# Altium PCB PCB-UVA-3.0.PcbDoc
Units mm, origin at the board's own origin, x right, y up, seen from the top; angles counter-clockwise.
Board outline 35.79 x 61.35 mm, 2 copper layers (Top Layer, Bottom Layer); 73 components, 53 nets, 232 pads, 72 vias.
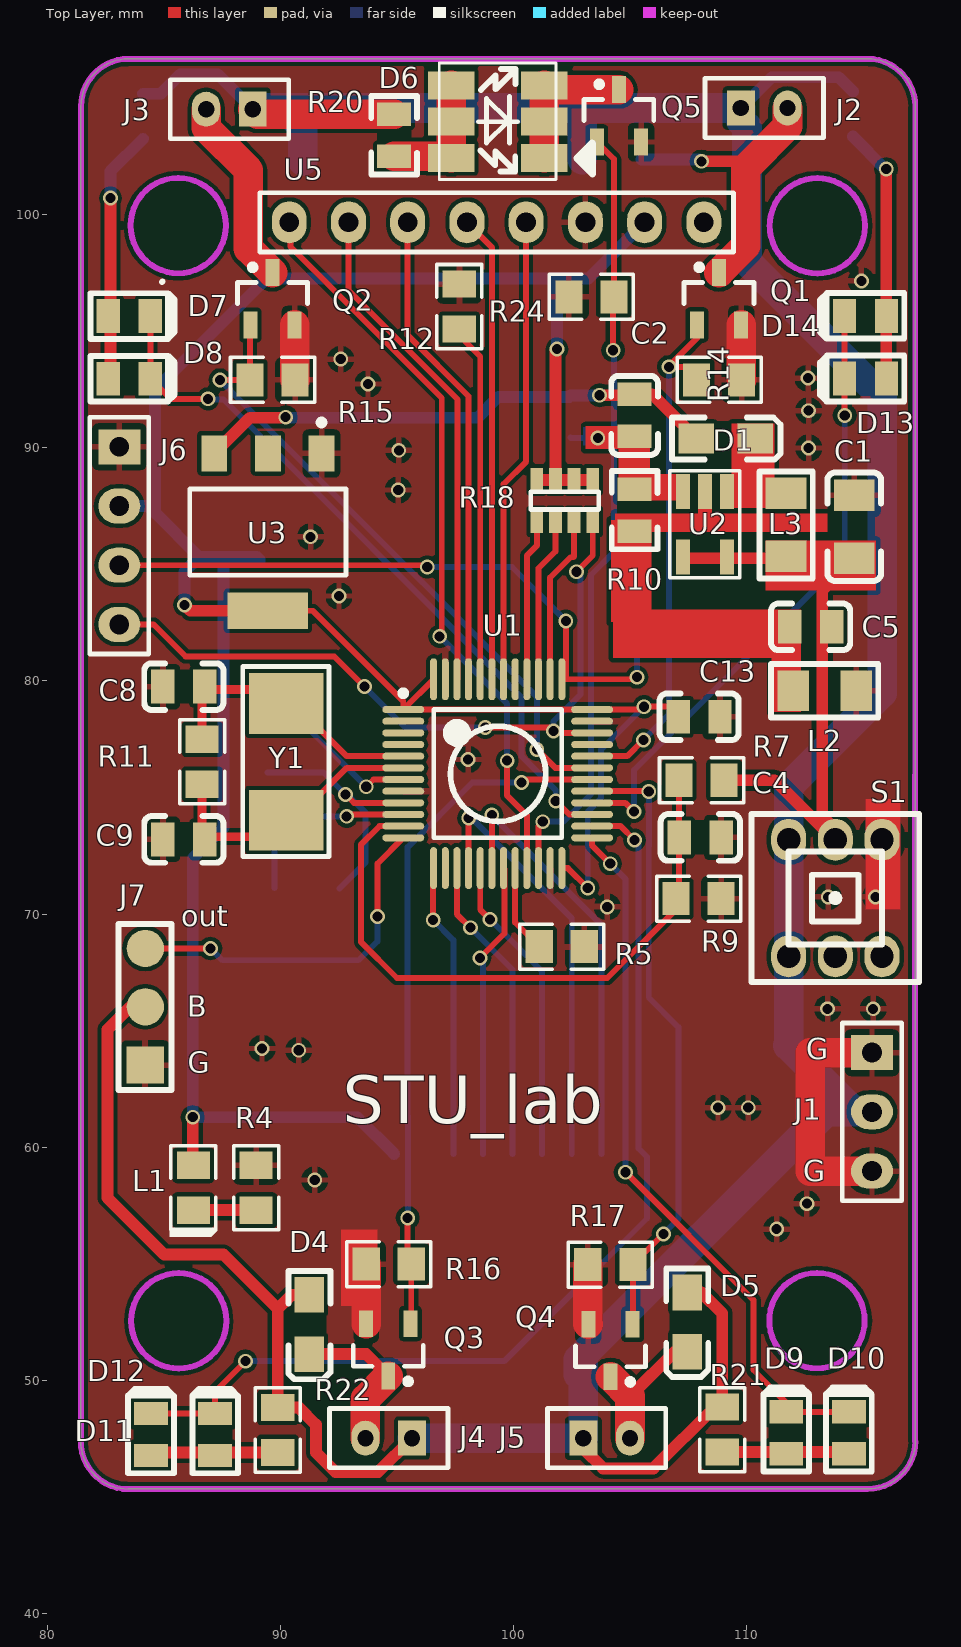
[diagram p0: Top Layer view]
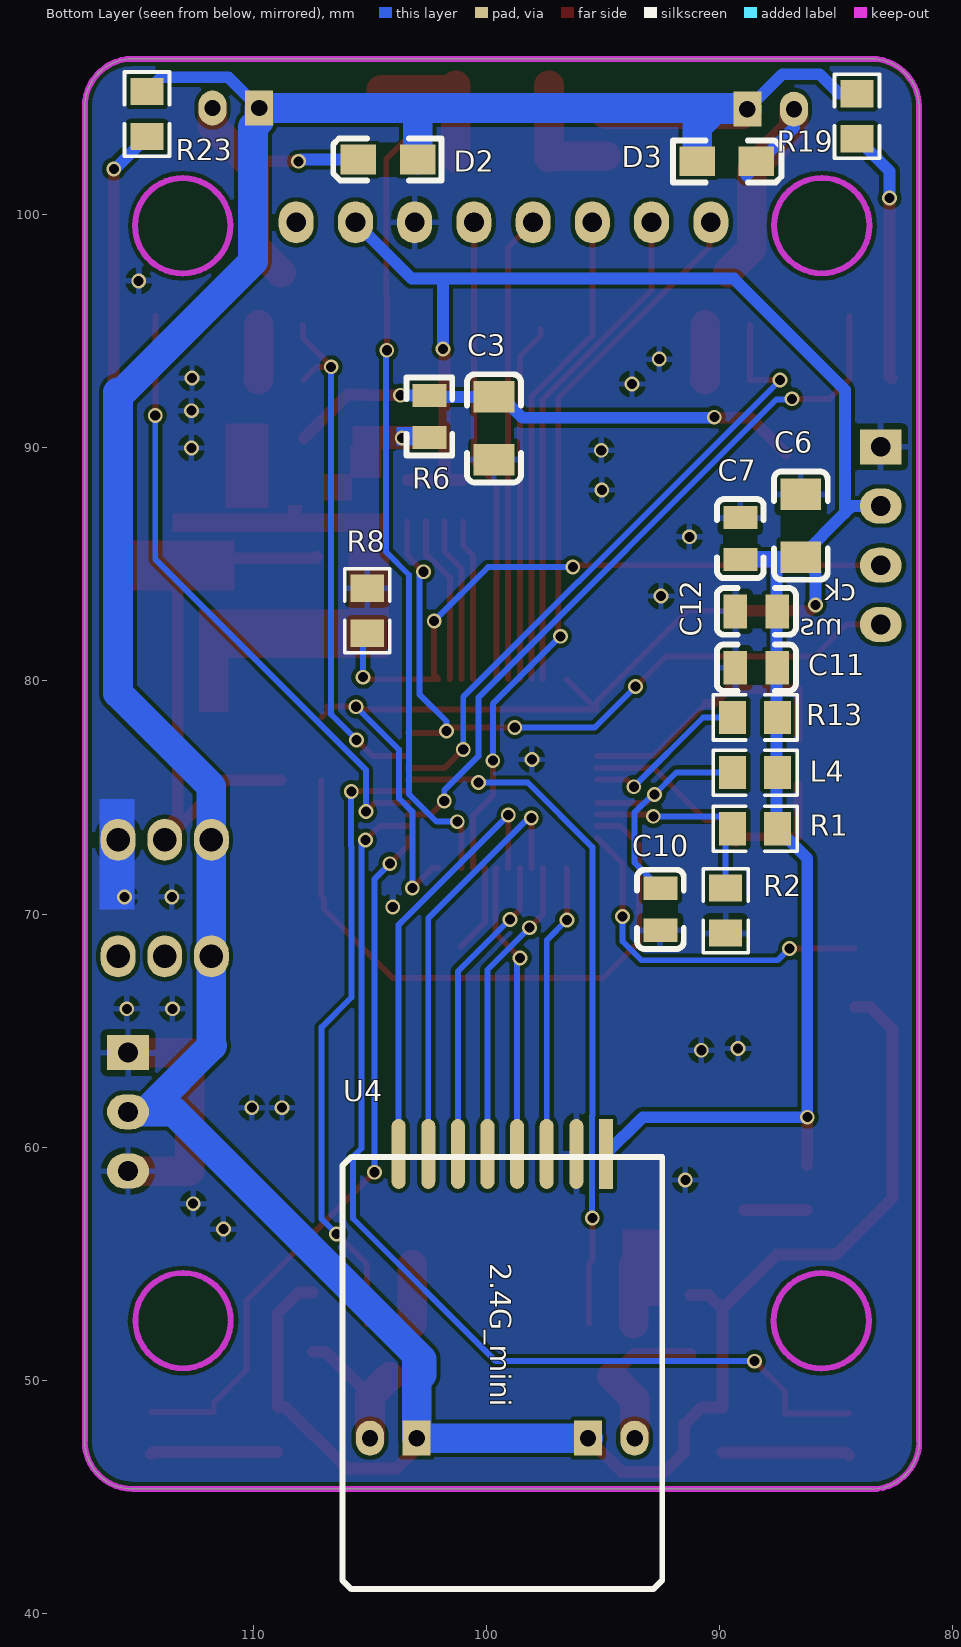
[diagram p1: Bottom Layer view, seen from below]
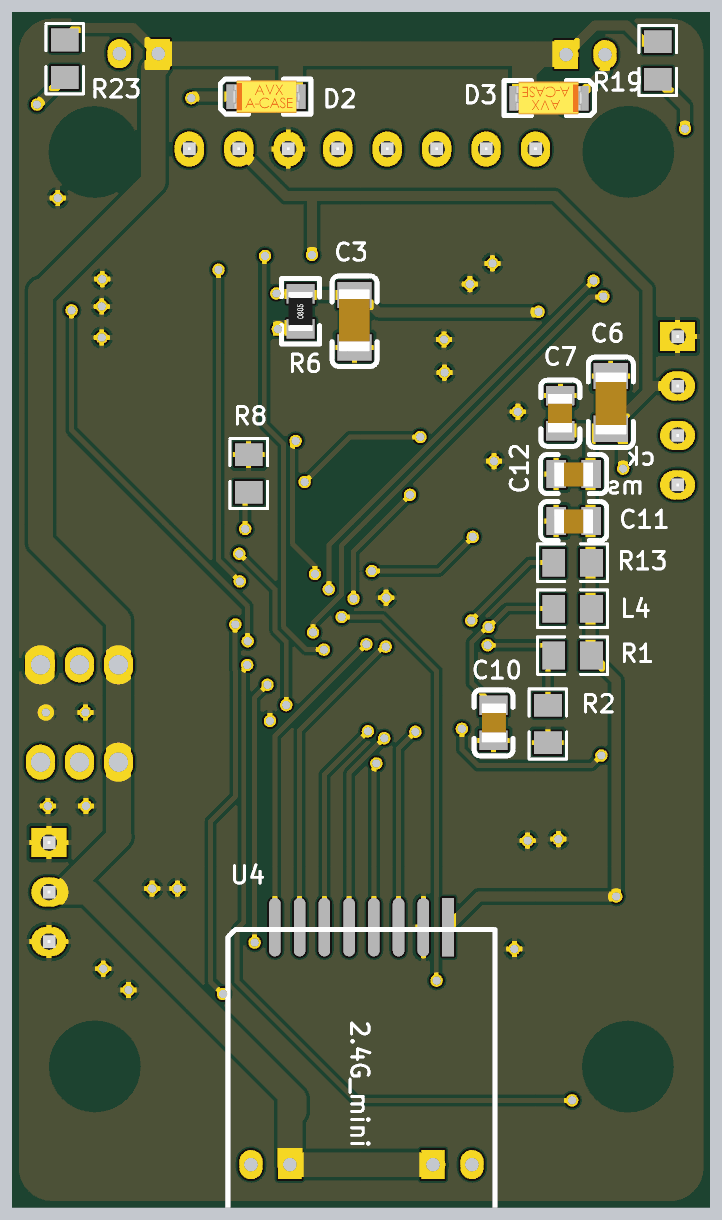
[diagram p2: 3D render of the assembled board from below, using the file's embedded part models]

## Layer stack, top to bottom
Top Solder: solder mask 0.0102, Solder Resist, Dk 3.5
Top Layer: signal copper 0.0356
Dielectric 1: dielectric 0.32, FR-4, Dk 4.8
Bottom Layer: signal copper 0.0356
Bottom Solder: solder mask 0.0102, Solder Resist, Dk 3.5

## Board outline
81.433,47.381 ccw(c83.478,47.381) 83.478,45.336 83.478,45.345 115.179,45.345 ccw(c115.179,47.389) 117.224,47.389 117.214,47.389 117.22,104.638 ccw(c115.176,104.638) 115.176,106.683 83.484,106.683 ccw(c83.484,104.638) 81.44,104.638

## Design rules (kind name [scope] priority, off if disabled: settings)
Clearance [All] p1: gap=0.178 ignorepadtopadclearanceinfootprint=FALSE
PlaneConnect [All] p1: planeconnectstyle=Relief reliefexpansion=0.508 reliefentries=4 reliefconductorwidth=0.381 reliefairgap=0.254
PolygonConnect [All] p1: connectstyle=Relief reliefconductorwidth=0.254 reliefentries=4 polygonreliefangle="90 Angle" airgapwidth=0.254
RoutingVias [All] p1: holewidth=0.432 width=0.635 viastyle="Through Hole" minholewidth=0.432 minwidth=0.635 maxholewidth=0.711 maxwidth=1.27
SolderMaskExpansion [All] p1: expansion=0.102
Width [All] p1: maxlimit=1.27 minlimit=0.254 preferedwidth=0.254
29 further rules are at their usual default settings.

## Components (designator, comment, footprint, x,y, rotation, side; value= is the part's Value field where it differs from the comment)
C1 "10UF" 1206C 114.605,86.614 r270 top
C2 "3.3pF" 0805C 105.181,91.389 r270 top
C3 "4.7UF" 1206C 99.67,90.83 r270 bottom
C4 "100NF" 0805C 108.002,73.288 r0 top
C5 "4.7UF" 0805C 112.734,82.321 r180 top
C6 "10UF" 1206C 86.512,86.665 r90 bottom
C7 "0.1UF" 0805C 89.103,86.106 r90 bottom
C8 "20PF" 0805C 85.852,79.756 r0 top
C9 "20PF" 0805C 85.852,73.203 r0 top
C10 "100NF" 0805C 92.532,70.206 r270 bottom
C11 "100NF" 0805C 88.417,80.569 r0 bottom
C12 "100NF" 0805C 88.417,82.982 r0 bottom
C13 "100NF" 0805C 107.95,78.461 r0 top
D1 "DIODE-S" C_SMA_3216 109.093,90.399 r180 top
D2 "DIODE-S" C_SMA_3216 104.216,102.362 r180 bottom
D3 "DIODE-S" C_SMA_3216 89.687,102.286 r0 bottom
D4 "DIODE-S" C_SMA_3216 91.237,52.4 r90 top
D5 "DIODE-S" C_SMA_3216 107.442,52.502 r90 top
D6 "LED" LED5050_RGB 99.314,103.988 r0 top
D7 "LED" 0805D 83.515,95.649 r0 top
D8 "LED" 0805D 83.515,92.964 r0 top
D9 "LED" 0805D 111.691,47.752 r90 top
D10 "LED" 0805D 114.376,47.752 r90 top
D11 "LED" 0805D 87.193,47.683 r90 top
D12 "LED" 0805D 84.444,47.683 r90 top
D13 "LED" 0805D 115.087,92.971 r180 top
D14 "LED" 0805D 115.087,95.656 r180 top
J1 "Li Battery - 3.7V" P3_2.54-1 115.367,61.519 r270 top
J2 "M1" P2_2.0-1 110.744,104.572 r180 top
J3 "M1" P2_2.0-1 87.808,104.521 r0 top
J4 "M1" P2_2.0-1 94.64,47.523 r0 top
J5 "M1" P2_2.0-1 103.988,47.523 r180 top
J6 "ST_LINK" P4_2.54-1 83.083,86.233 r270 top
J7 "SIP3" PC_3 84.201,63.525 r90 top
L1 "白" D0805 86.26,59.207 r270 top
L2 "10UH" 1206 113.335,79.578 r180 top
L3 "10UH" 1206 111.684,86.69 r270 top
L4 "INDUCTOR" R0805 88.467,76.073 r0 bottom
Q1 "SI2302" SI2302 108.788,96.393 r90 top
Q2 "SI2302" SI2302 89.637,96.393 r90 top
Q3 "SI2302" SI2302 94.635,51.306 r270 top
Q4 "SI2302" SI2302 104.165,51.283 r270 top
Q5 "SI2302" SI2302 104.496,104.242 r90 top
R1 "RES" R0805 88.477,73.66 r180 bottom
R2 "RES" R0805 89.738,70.146 r90 bottom
R4 "Res1" R0805 88.953,58.262 r90 top value=1k
R5 "RES" R0805 102.057,68.605 r0 top
R6 "620K" 0805R 102.438,91.338 r90 bottom
R7 "RES" R0805 108.062,75.743 r180 top
R8 "RES" R0805 105.102,83.007 r90 bottom
R9 "RES" R0805 107.925,70.663 r0 top
R10 "200K" 0805R 105.181,87.325 r90 top
R11 "RES" R0805 86.637,76.53 r90 top
R12 "RES" R0805 97.663,96.063 r270 top
R13 "RES" R0805 88.467,78.435 r0 bottom
R14 "RES" R0805 108.814,92.913 r180 top
R15 "RES" R0805 89.662,92.913 r180 top
R16 "RES" R0805 94.635,54.989 r0 top
R17 "RES" R0805 104.14,54.966 r0 top
R18 "10k" 8P4R_0603 102.21,87.732 r270 top
R19 "RES" R0805 84.099,104.216 r90 bottom
R20 "100R" 0805R 94.869,103.403 r270 top
R21 "RES" R0805 108.941,47.897 r270 top
R22 "RES" R0805 89.876,47.879 r270 top
R23 "RES" R0805 114.554,104.318 r270 bottom
R24 "RES" R0805 103.327,96.469 r0 top
S1 "SW-DPDT" KEY_KFT7.0 113.792,70.688 r270 top
U1 "STM32F103C8T6" LQFP48_N 99.314,76.022 r0 top
U2 "TPS6140" SOT-23-5 109.15,88.125 r270 top
U3 "AMS1117" ZZ311 89.459,86.385 r180 top
U4 "2.4G" 2.4G_mini 94.869,59.715 r0 bottom
U5 "GY_86" P8_2.54-1 99.263,99.67 r180 top
Y1 "CRYSTAL1" Y2 90.246,76.53 r90 top

## Footprints (in the part's own frame and the unit in brackets; to place one, negate y for a bottom-side part, rotate by r counter-clockwise, add the part's x,y. Pads: shape width x height; smd on the part's side, far side on the other; paste and mask are expansions set on the pad)
2.4G_mini [mm]
  rect 0.6x3 smd: 1(0,0)
  oval 0.6x3 smd: 2(1.27,0) 3(2.54,0) 4(3.81,0) 5(5.08,0) 6(6.35,0) 7(7.62,0) 8(8.89,0)
  silkscreen extent -2.41,0.13 11.3,18.67
8P4R_0603 [mil]
  rect 40x21.65 smd: 1(-35,46.5) 2(35,46.5) 3(-35,15) 4(35,15) 5(-35,-16.5) 6(35,-16.5) 7(-35,-47.99) 8(35,-47.99)
  silkscreen extent -15,-59 15,56
0805C [mm]
  rect 1x1.45 smd: 1(-0.9,0) 2(0.9,0)
  Top Layer pour cut-out: -0.432,0.749 -0.432,-0.737 0.406,-0.737 0.406,0.749
  silkscreen extent -1.7,-1 1.7,1, body extent -1,-0.61 1,0.64, height 1
0805D [mm]
  rect 1x1.45 smd: 1(-0.9,0) 2(0.9,0)
  Top Layer pour cut-out: -0.432,0.749 -0.432,-0.737 0.406,-0.737 0.406,0.749
  silkscreen extent -1.66,-0.98 1.94,0.98, body extent -1.16,-0.68 1.14,0.67, height 0.76
0805R [mm]
  rect 1x1.45 smd: 1(-0.9,0) 2(0.9,0)
  Top Layer pour cut-out: -0.432,0.749 -0.432,-0.737 0.406,-0.737 0.406,0.749
  silkscreen extent -1.68,-0.98 1.68,0.98, body extent -1,-0.62 1,0.63, height 0.5
1206 [mm]
  rect 1.35x1.75 smd: 1(-1.35,0) 2(1.35,0)
  Top Layer pour cut-out: -0.686,0.864 0.673,0.864 0.673,-0.876 -0.686,-0.876
  silkscreen extent -2.3,-1.14 2.3,1.14, body extent -1.61,-0.81 1.59,0.79, height 1.5
1206C [mm]
  rect 1.35x1.75 smd: 1(-1.35,0) 2(1.35,0)
  Top Layer pour cut-out: -0.686,0.876 0.673,0.876 0.673,-0.864 -0.686,-0.864
  silkscreen extent -2.32,-1.16 2.32,1.16, body extent -1.65,-0.81 1.55,0.79, height 1
C_SMA_3216 [mil] "英制1206/公制3216"
  rect 60x50 smd: 1(-50,0) 2(50,0)
  Top Layer pour cut-out: -19.69,29.53 19.69,29.53 19.69,-29.53 -19.69,-29.53
  silkscreen extent -93,-35 91,35, body extent -66,-33 68,33, height 67
D0805 [mil]
  rect 46x56 smd: 1(-1,0) 2(75,0)
  silkscreen extent -34,-40 120,40
KEY_KFT7.0 [mm] "7X7mm"
  oval 1.8x1.5 hole 1: 1(-2.5,2) 2(-2.5,0) 3(-2.5,-2) 4(2.5,-2) 5(2.5,0) 6(2.5,2)
  silkscreen extent -3.6,-3.6 3.6,3.6
LED5050_RGB [mm]
  rect 2x1.2 smd paste-0.05 mask+0.05: 1(-2,1.55) 2(-2,0) 3(-2,-1.55) 4(2,-1.55) 5(2,0) 6(2,1.55)
  silkscreen extent -2.51,-2.49 4.06,2.51, body extent -2.68,-2.5 2.62,2.5, height 1.6
LQFP48_N [mm]
  oval 1.8x0.3 smd: 1(-4.05,2.75) 2(-4.05,2.25) 3(-4.05,1.75) 4(-4.05,1.25) 5(-4.05,0.75) 6(-4.05,0.25) 7(-4.05,-0.25) 8(-4.05,-0.75) 9(-4.05,-1.25) 10(-4.05,-1.75) 11(-4.05,-2.25) 12(-4.05,-2.75) 25(4.05,-2.75) 26(4.05,-2.25) 27(4.05,-1.75) 28(4.05,-1.25) 29(4.05,-0.75) 30(4.05,-0.25) 31(4.05,0.25) 32(4.05,0.75) 33(4.05,1.25) 34(4.05,1.75) 35(4.05,2.25) 36(4.05,2.75)
  oval 0.3x1.8 smd: 13(-2.75,-4.05) 14(-2.25,-4.05) 15(-1.75,-4.05) 16(-1.25,-4.05) 17(-0.75,-4.05) 18(-0.25,-4.05) 19(0.25,-4.05) 20(0.75,-4.05) 21(1.25,-4.05) 22(1.75,-4.05) 23(2.25,-4.05) 24(2.75,-4.05) 37(2.75,4.05) 38(2.25,4.05) 39(1.75,4.05) 40(1.25,4.05) 41(0.75,4.05) 42(0.25,4.05) 43(-0.25,4.05) 44(-0.75,4.05) 45(-1.25,4.05) 46(-1.75,4.05) 47(-2.25,4.05) 48(-2.75,4.05)
  silkscreen extent -4.17,-2.75 2.75,3.57
P2_2.0-1 [mm]
  rect 1.2x1.5 hole 0.7: 1(1,0)
  oval 1.2x1.5 hole 0.7: 2(-1,0)
  silkscreen extent -2.54,-1.27 2.54,1.27
P3_2.54-1 [mm]
  rect 1.5x1.8 hole 0.85: 1(-2.54,0)
  oval 1.5x1.8 hole 0.85: 2(0,0) 3(2.54,0)
  silkscreen extent -3.81,-1.27 3.81,1.27, body extent -3.81,-1.47 3.81,1.45, height 8.56
P4_2.54-1 [mm]
  rect 1.5x1.8 hole 0.85: 1(-3.81,0)
  oval 1.5x1.8 hole 0.85: 2(-1.27,0) 3(1.27,0) 4(3.81,0)
  silkscreen extent -5.08,-1.27 5.08,1.27, body extent -5.08,-1.47 5.08,1.45, height 8.56
P8_2.54-1 [mm]
  oval 1.5x1.8 hole 0.85: 1(-8.89,0) 2(-6.35,0) 3(-3.81,0) 4(-1.27,0) 5(1.27,0) 6(3.81,0) 7(6.35,0) 8(8.89,0)
  silkscreen extent -10.16,-1.27 10.16,1.27, body extent -10.16,-1.47 10.16,1.45, height 8.56
PC_3 [mm]
  rect 1.6x1.6 smd: 1(0,0)
  round 1.6 smd: 2(2.5,0) 3(5,0)
  silkscreen extent -1.07,-1.12 6.05,1.14
R0805 [mil]
  rect 46x56 smd: 1(-37.79,0.07) 2(38.21,0.07)
  silkscreen extent -71,-38 71,38
SI2302 [mm]
  rect 1.15x0.6 smd: 1(-1.128,0.934) 2(-1.128,-0.966) 3(1.122,-0.016)
  silkscreen extent -0.2,-1.52 1.47,1.48, body extent -0.7,-1.52 0.7,1.48, height 1.1
SOT-23-5 [mm]
  rect 1.5x0.6 smd: 1(0,0) 2(0,-0.95) 3(0,-1.9) 4(2.8,-1.9) 5(2.8,0)
  silkscreen extent -0.9,-2.45 3.7,0.55
Y2 [mm]
  rect 2.6x3.2 smd: 1(-2.5,0) 2(2.5,0)
  silkscreen extent -4.06,-1.83 4.09,1.87
ZZ311 [mm]
  rect 1.1x1.55 smd: 1(-2.3,-3.375) 2(0,-3.375) 3(2.3,-3.375)
  rect 3.45x1.55 smd: 4(0,3.375)
  silkscreen extent -3.35,-4.82 3.35,1.85

## Part data
C1 C2 C3 C4 C5 C6 C7 C8 C9 C10 C11 C12 C13: library part CAP, "Capacitor/小容量电容"
D1 D2 D3 D4 D5: "SCHOTTKEY"
D6: library part LED_5050RGB
J1: library part SIP3
J2 J3 J4 J5: library part SIP2
J6: library part SIP4
L1: library part LED
L2 L3: library part L
R1 R2 R5 R7 R8 R9 R11 R12 R13 R14 R15 R16 R17 R19 R21 R22 R23 R24: "Semiconductor Resistor"
  R1 R2 R5 R8 R12 R13 R14 R15 R16 R17 R24: Val=10k
  R7 R9: Val=100k
  R11: Val=1M
  R19 R21 R22 R23: Val=2K
R4: "Resistor", LatestRevisionDate=17-Jul-2002, LatestRevisionNote="Re-released for DXP Platform.", Published=8-Jun-2000, Publisher="Altium Limited"
R6 R10 R20: library part Res
R18: library part 8P4R_0603, "8P4R_0603"
S1: "Double-Pole, Double-Throw Switch", LatestRevisionDate=17-Jul-2002, LatestRevisionNote="Re-released for DXP Platform.", PackageDescription="Switch; 6 Leads", PackageReference=DPDT-6, Published=24-Mar-1999, Publisher="Altium Limited"
U1: "STM32 ARM-based 32-bit MCU with 64 Kbytes Flash, 48-pin LQFP, Industrial Temperature"
U3: "Header, 2-Pin"
U4: library part 2.4G_mini
L4: Val=10uH
Y1: Val=8MHz

## Via types
v1: diameter 0.635, hole 0.432, Top Layer to Bottom Layer, 72 vias

## Nets (pads, with @x,y where several pads share a name; then routed paths per layer and width w, separated by ;. In a path a pad name is that pad's centre, name@x,y a point inside that pad or via, vN(x,y) a via of type N, cw(c..) or ccw(c..) an arc to the next point about the centre after c; other vN are vias at no path point)
2.4_CE: U1.13 U4.3 | length 12.6
  Top Layer w0.254: v1(96.545,69.748) 96.545,71.954 U1.13
  Bottom Layer w0.254: v1(96.545,69.748) 97.409,68.885 U4.3
2.4_CSN: U1.19 U4.4 | length 12.8
  Top Layer w0.254: v1(98.552,68.123) 99.606,69.177 99.606,71.93 U1.19
  Bottom Layer w0.254: v1(98.552,68.123) 98.679,67.996 U4.4
2.4_IRQ: U1.18 U4.8 | length 18.7
  Top Layer w0.254: v1(99.06,74.244) 99.06,71.976 U1.18
  Bottom Layer w0.254: v1(99.06,74.244) 103.759,69.545 U4.8
2.4_MISO: U1.16 U4.7 | length 18.5
  Top Layer w0.254: U1.16 98.064,74.112 v1(98.069,74.117)
  Bottom Layer w0.254: v1(98.069,74.117) 98.196,74.117 102.489,69.825 U4.7
2.4_MOSI: U1.17 U4.6 | length 13.4
  Top Layer w0.254: U1.17 98.564,70.194 v1(98.984,69.774)
  Bottom Layer w0.254: v1(98.984,69.774) 101.219,67.539 U4.6
2.4_SCK: U1.15 U4.5 | length 13.2
  Top Layer w0.254: U1.15 97.564,70 v1(98.146,69.418)
  Bottom Layer w0.254: v1(98.146,69.418) 99.949,67.615 U4.5
505LED: Q5.1 R24.2 U1.22 | length 33.3
  Top Layer w0.254: U1.22 101.064,73.784 v1(101.244,73.965) ; Q5.1 104.292,102.383 104.292,96.466 104.267,96.44 v1(104.267,94.183)
  Bottom Layer w0.254: v1(101.244,73.965) 102.133,73.965 103.314,75.146 103.314,84.544 104.305,85.534 104.305,94.145 v1(104.267,94.183)
+3.3V: C6.1 C7.1 C11.1 C12.1 C13.1 J6.2 L1.1 L4.1 R1.2 R13.1 R18.1 R18.3 R18.5 R18.7 U1.1 U1.24 U1.36 U1.48 U3.4 U4.1 U5.2 | length 123.6
  Top Layer w0.254: U3.4 91.386,83.01 95.264,79.132 U1.1 ; U1.48 U1.1 ; U1.24 102.323,71.972 v1(103.175,71.12) ; v1(105.588,78.892) 105.588,78.772 U1.36 U1.1 ; v1@105.588,78.905 C13.1@106.832,78.905 ; C13.1@106.738,78.772 C13.1
  Top Layer w0.508: v1(85.877,83.261) 86.128,83.01 U3.4 ; v1(86.233,61.29) 86.233,59.26 L1.1 ; R18.7 R18.5 ; v1(101.854,94.234) 101.791,94.171 R18.5 ; R18.1 R18.3 R18.5
  Bottom Layer w0.254: v1(103.175,71.12) 103.175,74.396 103.746,74.967 103.746,77.051 v1(105.588,78.892)
  Bottom Layer w0.508: J6.2 84.324,87.503 84.618,87.209 ; v1(85.877,83.261) 85.877,84.68 C6.1 ; C6.1@86.712,85.115 87.554,85.115 ; C7.1@89.103,85.115 87.554,85.115 ; C7.1 88.994,85.315 87.554,85.315 ; U4.1 93.294,61.29 v1(86.233,61.29) 86.233,72.388 R1.2 87.554,73.709 87.554,85.115 ; v1(101.854,94.234) 101.854,97.231 101.829,97.257 ; U5.2 103.2,97.257 101.829,97.257 ; 84.618,87.209 C6.1 ; 84.618,87.209 84.618,92.492 89.383,97.257 101.829,97.257 ; C6.1 87.554,85.315 ; 87.554,85.115 87.554,85.315
+5.0V: C2.1 C3.1 D1.2 R6.2 U3.3 | length 22.5
  Top Layer w0.508: U3.3 88.686,91.288 90.195,91.288 v1(90.221,91.313) ; v1(103.683,92.253) 105.145,92.253 C2.1 105.932,92.289 D1.2
  Bottom Layer w0.508: v1(90.221,91.313) 90.246,91.288 98.45,91.288 99.343,92.18 C3.1 102.38,92.18 R6.2 103.668,92.238 v1(103.683,92.253)
ADC: C4.1 R7.2 R9.1 U1.11 | length 27.3
  Top Layer w0.254: U1.11 94.245,73.772 93.447,72.974 93.447,68.809 94.996,67.259 104.013,67.259 106.965,70.211 R9.1 107.092,70.792 R7.2
BAT: D2.2 D3.2 D4.2 D5.2 J1.2 J2.1 J3.1 J4.1 J5.1 J7.2 R19.2 R20.1 R21.1 R22.1 R23.1 S1.3 S1.4 | length 167.8
  Top Layer w0.508: J7.2 83.551,66.025 82.575,65.049 82.575,57.836 85.014,55.397 87.554,55.397 89.878,53.073 ; D4.2 90.475,53.67 89.878,53.073 ; J4.1 94.193,46.076 92.354,46.076 91.516,46.914 91.516,48.108 90.785,48.839 R22.1 89.878,53.073 ; J5.1 102.988,47.076 103.835,46.228 105.994,46.228 108.623,48.857 R21.1 108.942,52.881 108.052,53.772 D5.2
  Top Layer w1.27: J3.1 89.025,104.303 R20.1
  Bottom Layer w0.508: R19.2 84.867,105.187 85.7,106.02 87.309,106.02 J3.1 ; J2.1 111.065,105.893 113.937,105.893 R23.1
  Bottom Layer w1.27: J3.1 90.195,104.521 90.957,103.759 D3.2 ; J3.1@88.859,104.572 102.972,104.572 ; J4.1 102.962,47.523 102.988,47.498 102.988,51.019 ; 102.768,50.241 102.768,50.902 113.386,61.519 J1.2@114.605,61.519 ; D2.2 102.946,104.546 102.972,104.572 ; J1.2 J1.2@114.605,61.519 ; 102.972,104.572 J2.1 109.744,104.022 110.007,103.759 110.007,97.993 115.621,92.38 115.799,92.38 115.799,79.477 111.792,75.47 S1.3 S1.4 111.792,64.396 111.76,64.364 J1.2@114.605,61.519
GND: C1.1 C3.2 C4.2 C6.2 C7.2 C8.1 C9.1 C10.2 C11.2 C12.2 C13.2 J1.1 J1.3 J6.1 J7.1 L2.1 Q1.2 Q2.2 Q3.2 Q4.2 Q5.2 R2.1 R4.2 R5.2 R8.2 R9.2 R12.1 R14.1 R15.1 R16.1 R17.1 R24.1 S1.1 U1.8 U1.23 U1.35 U1.47 U3.1 U4.2 U5.3 | length 20
  Top Layer w1.27: Q2.2 90.603,92.931 R15.1 ; Q3.2 93.669,54.985 R16.1 ; R17.1 103.18,52.43 Q4.2 ; Q1.2 109.754,92.931 R14.1 ; 112.725,58.979 J1.3 ; 112.725,59.182 112.725,64.059 J1.1
  other v1: 111.277,56.49 112.573,57.582 91.465,58.598 108.763,61.697 110.058,61.697 90.78,64.16 89.205,64.237 113.462,65.938 115.418,65.938 104.013,70.307 113.487,70.739 115.519,70.739 98.044,76.632 92.507,83.642 91.288,86.182 95.047,88.189 95.072,89.891 112.649,89.992 112.649,91.592 93.751,92.735 112.624,92.989 92.583,93.802 114.91,97.155
GY_DRDY: U1.21 U5.8 | length 32.3
  Top Layer w0.254: U5.8 90.627,99.67 90.424,99.466 90.424,98.628 96.914,92.138 96.914,82.004 v1(96.825,81.915) ; v1(99.72,76.581) 99.708,76.568 99.708,75.095 100.564,74.239 U1.21
  Bottom Layer w0.254: v1(96.825,81.915) 99.72,79.019 v1(99.72,76.581)
GY_FSYNC: U1.45 U5.6 | length 20.7
  Top Layer w0.254: U5.6 95.453,94.82 98.064,92.21 U1.45
GY_INTA: U1.46 U5.7 | length 21.5
  Top Layer w0.254: U5.7 92.913,96.75 97.587,92.076 97.587,80.095 U1.46
GY_SCL: U1.42 U5.4 | length 20
  Top Layer w0.254: U1.42 99.564,88.439 100.533,89.408 U5.4
GY_SDA: U1.43 U5.5 | length 20
  Top Layer w0.254: U5.5 99.064,98.599 U1.43
JTCK: J6.3 R8.1 U1.37 | length 27.9
  Top Layer w0.254: J6.3 96.215,84.963 v1(96.291,84.887) ; v1(102.235,82.575) 102.235,80.243 U1.37 105.193,80.072 v1(105.283,80.162)
  Bottom Layer w0.254: v1(96.291,84.887) 99.924,84.887 v1(102.235,82.575) ; R8.1 105.283,81.868 v1(105.283,80.162)
JTDI: R18.4 U1.38 | length 7.3
  Top Layer w0.254: U1.38 101.564,84.435 102.434,85.306 102.552,85.306 102.591,85.344 R18.4
JTDO: R18.6 U1.39 | length 7.1
  Top Layer w0.254: U1.39 101.064,84.833 101.791,85.56 R18.6
JTMS: J6.4 R18.2 U1.34 | length 32
  Top Layer w0.254: J6.4 84.557,82.423 85.928,81.051 92.304,81.051 v1(93.599,79.756) ; v1(98.781,78.003) 101.549,78.003 v1(101.702,77.851) 101.78,77.772 U1.34 ; v1(102.692,84.684) 103.391,85.382 R18.2
  Bottom Layer w0.254: v1(93.599,79.756) 95.352,78.003 v1(98.781,78.003) ; v1(101.702,77.851) 101.702,78.257 102.857,79.413 102.857,84.519 v1(102.692,84.684)
JTRST: R18.8 U1.40 | length 6.9
  Top Layer w0.254: U1.40 100.564,85.375 100.991,85.801 R18.8
LED_1: D9.2 D10.2 U1.25 | length 30.8
  Top Layer w0.254: U1.25 103.364,72.937 v1(104.14,72.161) ; v1(104.8,58.928) 110.287,53.442 110.287,50.444 111.691,49.04 D9.2 D10.2
  Bottom Layer w0.254: v1(104.14,72.161) 104.8,71.501 v1(104.8,58.928)
LED_2: D11.2 D12.2 U1.26 | length 43.8
  Top Layer w0.254: D12.2 D11.2 87.193,49.525 v1(88.494,50.825) ; U1.26 104.587,73.772 v1(105.181,73.177)
  Bottom Layer w0.254: v1(88.494,50.825) 99.593,50.825 105.715,56.947 105.715,59.588 105.359,59.944 105.359,73 v1(105.181,73.177)
LED_3: D7.2 D8.2 U1.27 | length 31.1
  Top Layer w0.254: D7.2 D8.2 85.279,92.1 v1(86.893,92.1) ; v1(101.803,74.854) 102.385,74.272 U1.27
  Bottom Layer w0.254: v1(86.893,92.1) 86.919,92.075 87.554,92.075 100.343,79.286 100.343,76.772 101.803,75.311 v1(101.803,74.854)
LED_4: D13.2 D14.2 U1.28 | length 27
  Top Layer w0.254: U1.28 104.78,74.772 v1(105.156,74.397) ; D14.2 D13.2 114.187,91.4 v1(114.198,91.389)
  Bottom Layer w0.254: v1(105.156,74.397) 105.156,76.175 114.198,85.217 v1(114.198,91.389)
MOS_1: Q4.1 R17.2 U1.29 | length 26.6
  Top Layer w0.254: U1.29 105.779,75.272 v1(105.791,75.26) ; Q4.1 105.111,52.422 R17.2 105.111,54.971 v1(106.426,56.286)
  Bottom Layer w0.254: v1(105.791,75.26) 105.804,75.248 105.804,72.92 105.791,72.907 105.791,66.421 107.061,65.151 107.061,56.921 v1(106.426,56.286)
MOS_2: Q3.1 R16.2 U1.30 | length 29.6
  Top Layer w0.254: v1(95.453,56.972) 95.453,55.143 R16.2 95.606,52.471 Q3.1 ; v1(100.33,75.641) 100.461,75.772 U1.30
  Bottom Layer w0.254: v1(95.453,56.972) 95.474,56.993 95.474,61.342 95.453,61.362 95.453,72.873 98.222,75.641 v1(100.33,75.641)
MOS_3: Q2.1 R15.2 U1.31 | length 27.8
  Top Layer w0.254: v1(87.401,92.913) 88.69,92.913 R15.2 88.691,95.254 Q2.1 ; v1(100.99,77.064) 101.782,76.272 U1.31
  Bottom Layer w0.254: v1(87.401,92.913) 87.401,92.897 96.034,84.264 96.05,84.264 100.99,79.324 v1(100.99,77.064)
MOS_4: Q1.1 R14.2 U1.32 | length 22.7
  Top Layer w0.254: U1.32 104.865,76.772 v1(105.562,77.47) ; R14.2 107.282,93.472 v1(106.655,93.472) 106.655,93.497 107.854,94.697 Q1.1
  Bottom Layer w0.254: v1(105.562,77.47) 106.655,78.562 v1(106.655,93.472)
NetC1_2: C1.2 C5.1 L3.2 R7.1 S1.2 U2.4 U2.5 | length 26.2
  Top Layer w0.508: U2.4 107.311,85.264 C1.2 113.233,83.892 113.233,74.193 113.741,73.685 113.741,73.188 111.188,75.741 R7.1@108.819,75.741
NetC2_2: C2.2 R6.1 R10.2 U2.3 | length 1.3
  Top Layer w0.254: v1(103.607,90.424) v1@103.734,90.424
  Bottom Layer w0.254: R6.1 102.453,90.424 v1(103.607,90.424)
NetC8_2: C8.2 R11.2 U1.5 Y1.2 | length 12
  Top Layer w0.254: Y1.2@90.576,79.03 92.834,76.772 U1.5
  Top Layer w0.381: R11.2 86.636,79.64 C8.2 ; C8.2@86.752,79.629 89.647,79.629 Y1.2 Y1.2@90.576,79.03
NetC9_2: C9.2 R11.1 U1.6 Y1.1 | length 11
  Top Layer w0.254: Y1.1 90.591,74.03 92.833,76.272 U1.6
  Top Layer w0.381: R11.1 86.636,73.319 89.048,73.319 Y1.1@89.292,73.076
NetC10_1: C10.1 L4.2 U1.9 | length 11.3
  Top Layer w0.254: v1(92.786,75.133) 93.147,74.772 U1.9
  Bottom Layer w0.254: L4.2 91.848,76.071 v1(92.786,75.133) 92.862,75.133 93.65,74.346 93.65,72.223 C10.1
NetD1_1: D1.1 L3.1 U2.1
NetD2_1: D2.1 J2.2 Q1.3 | length 12.9
  Top Layer w0.508: v1(108.052,102.286) 109.677,102.286 109.957,102.006
  Top Layer w1.27: Q1.3 109.957,98.667 109.957,102.006 111.744,103.794 J2.2
  Bottom Layer w0.508: D2.1 107.975,102.362 v1(108.052,102.286)
NetD3_1: D3.1 J3.2 Q2.3 | length 11.9
  Top Layer w1.27: J3.2 86.808,103.718 88.621,101.905 88.621,98.547 Q2.3
  Bottom Layer w0.508: J3.2 86.808,103.718 D3.1@88.849,101.676
NetD4_1: D4.1 J4.2 Q3.3 | length 6.8
  Top Layer w0.508: D4.1 93.673,51.13 Q3.3
  Top Layer w1.27: J4.2 93.64,49.206 Q3.3
NetD5_1: D5.1 J5.2 Q4.3 | length 6.2
  Top Layer w0.508: 104.988,49.322 106.897,51.232 D5.1
  Top Layer w1.27: Q4.3 104.988,49.322 J5.2
NetD6_1: D6.1 D6.2 D6.3 R20.2 | length 5.6
  Top Layer w1.27: R20.2 97.248,102.503 D6.3 D6.1
NetD6_4: D6.4 D6.5 D6.6 Q5.3 | length 6.4
  Top Layer w1.27: D6.4 D6.6 101.488,105.364 Q5.3
NetD7_1: D7.1 D8.1 R19.1 | length 10.9
  Top Layer w0.508: D8.1 82.702,93.051 v1(82.702,100.711)
  Bottom Layer w0.508: v1(82.702,100.711) 82.702,101.858 R19.1
NetD9_1: D9.1 D10.1 R21.2 | length 5.5
  Top Layer w0.508: R21.2 114.302,46.926 D10.1
NetD11_1: D11.1 D12.1 R22.2 | length 5.5
  Top Layer w0.508: D12.1 84.569,46.908 R22.2
NetD13_1: D13.1 D14.1 R23.2 | length 11
  Top Layer w0.508: v1(115.976,101.956) 115.976,92.982 D13.1
  Bottom Layer w0.508: R23.2 115.944,101.956 v1(115.976,101.956)
NetL1_2: L1.2 R4.1 | length 2.7
  Top Layer w0.508: L1.2 R4.1
NetR1_1: R1.1 R2.2 U1.10 | length 8.8
  Top Layer w0.254: v1(92.837,74.193) 92.916,74.272 U1.10
  Bottom Layer w0.254: R2.2 89.74,73.359 R1.1 89.969,74.193 v1(92.837,74.193)
NetR5_1: R5.1 U1.20 | length 3.8
  Top Layer w0.254: U1.20 100.064,69.641 R5.1
NetR12_2: R12.2 U1.44 | length 15.4
  Top Layer w0.254: R12.2 97.665,94.816 98.564,93.917 U1.44
NetR13_2: R13.2 U1.7 | length 7.2
  Top Layer w0.254: v1(93.675,75.463) 93.984,75.772 U1.7
  Bottom Layer w0.254: R13.2 90.705,78.433 v1(93.675,75.463)
OUT_1: J7.3 U1.12 | length 15.4
  Top Layer w0.254: J7.3 84.205,68.529 v1(86.995,68.529) ; v1(94.158,69.901) 94.158,72.166 U1.12
  Bottom Layer w0.254: v1(86.995,68.529) 87.503,68.021 93.345,68.021 94.158,68.834 v1(94.158,69.901)
SGND: C5.2 L2.2 R10.1 U2.2
pads on no net: S1.5 S1.6 U1.2 U1.3 U1.4 U1.14 U1.33 U1.41 U3.2 U5.1

## Polygon pours and split planes (outlines as drawn)
GND on Top Layer "Top Layer-No Net" (solid, remove dead copper, pour order 6): 73.558,111.125 120.091,111.125 120.32,111.354 120.752,110.922 120.752,40.996 78.334,40.996 76.886,39.548
GND on Bottom Layer "Top Layer-No Net" (solid, remove dead copper, pour order 8): 77.216,108.763 77.978,109.525 123.038,109.525 123.038,44.755 121.285,43.002 120.802,43.485 78.969,43.485

## Keep-outs
Keep-Out Layer:
  lines w0.254: 81.433,47.381 ccw(c83.478,47.381) 83.478,45.336 ; 81.44,47.381 81.44,104.638 cw(c83.484,104.638) 83.484,106.683 115.176,106.683 cw(c115.176,104.638) 117.22,104.638 117.214,47.389 ; 83.478,45.345 115.179,45.345 ccw(c115.179,47.389) 117.224,47.389 ; 83.567,99.531 cw(c85.612,99.531) 85.612,101.576 cw(c85.612,99.531) 87.656,99.531 cw(c85.612,99.531) 85.612,97.487 cw(c85.612,99.531) 83.567,99.531 ; 83.588,52.555 cw(c85.633,52.555) 85.633,54.599 cw(c85.633,52.555) 87.677,52.555 cw(c85.633,52.555) 85.633,50.51 cw(c85.633,52.555) 83.588,52.555 ; 110.963,52.567 cw(c113.007,52.567) 113.007,54.612 cw(c113.007,52.567) 115.052,52.567 cw(c113.007,52.567) 113.007,50.523 cw(c113.007,52.567) 110.963,52.567 ; 110.979,99.522 cw(c113.024,99.522) 113.024,101.566 cw(c113.024,99.522) 115.068,99.522 cw(c113.024,99.522) 113.024,97.477 cw(c113.024,99.522) 110.979,99.522

## Other copper
Top Layer:
  rectangle net GND: 115.087,70.206 116.586,74.93
  rectangle net GND: 92.583,53.192 94.152,56.464
  rectangle net NetC2_2: 105.766,87.732 106.959,88.875
  rectangle net NetC2_2: 104.496,88.697 105.842,90.068
  rectangle net NetC2_2: 103.073,89.941 105.74,90.932
  rectangle net NetD1_1: 109.347,87.427 111.176,91.034
  rectangle net SGND: 107.899,86.639 108.509,87.554
  rectangle net SGND: 104.343,86.385 113.462,87.173
  rectangle net SGND: 104.165,82.525 105.918,86.893
  rectangle net SGND: 104.267,80.975 112.328,83.058
  rectangle net SGND: 111.049,78.664 112.328,83.058
  rectangle net NetC1_2: 110.807,83.871 115.545,86.017
Bottom Layer:
  rectangle net GND: 115.087,70.206 116.586,74.93
  rectangle net NetC2_2: 102.972,90.094 103.861,90.881

## Silkscreen, mask and mechanical layers (free items; w line width, h text height)
Top Overlay:
  lines w0.254: 84.912,97.104 84.938,97.13 ; 97.286,76.014 cw(c99.33,76.014) 99.33,78.058 cw(c99.33,76.014) 101.375,76.014 cw(c99.33,76.014) 99.33,73.969 cw(c99.33,76.014) 97.286,76.014
  text "out" at 85.75,69.469 h0.89
  text "B" at 86.004,65.608 h0.89
  text "G" at 112.547,63.779 h0.89
  text "G" at 86.03,63.195 h0.89
  text "STU_lab" at 92.659,61.036 h2.03
  text "G" at 112.42,58.547 h0.89
Bottom Overlay:
  text "ck" at 84.125,83.464 h0.89
  text "ms" at 84.709,81.991 h0.89

## Text inside footprints (layer, text, board x,y; h text height)
U4: Bottom Overlay "2.4G_mini" at 99.822,55.016 h0.89 r90